# EAGLE board BNSK Authoring Light (EAGLE 9.6.2)

Size 78 x 68 mm. Coordinates in mm from the lower left corner, seen from the top.
Outline: 0,0 78,0 78,68 0,68 0,0
Copper layers (1*16): Top 0.035mm / dielectric 1.5mm / Bottom 0.035mm
Design rules "default": minimum track width 10mil, minimum drill 24mil, track to track 8mil, track to pad 8mil, pad to pad 8mil, via to via 8mil, smd to smd 8mil, copper to edge 40mil, drill to drill 8mil, minimum pad ring 10mil, minimum via ring 8mil, stop-mask expansion 4mil, vias tented up to drill 0mil, thermal gap 10mil

## Footprints (pad centres in the part's own frame; a part is rotated, then mirrored left to right if it is on the bottom)
DIL16 = drill 0.813 long: 1 -8.89,-3.81; 2 -6.35,-3.81; 3 -3.81,-3.81; 4 -1.27,-3.81; 5 1.27,-3.81; 6 3.81,-3.81; 7 6.35,-3.81; 8 8.89,-3.81; 9 8.89,3.81; 10 6.35,3.81; 11 3.81,3.81; 12 1.27,3.81; 13 -1.27,3.81; 14 -3.81,3.81; 15 -6.35,3.81; 16 -8.89,3.81
SMADIODE = smd 2.54 x 2.54: A 2.349,0; C -2.349,0
1X04 = drill 1.016 long: 1 -3.81,0; 2 -1.27,0; 3 1.27,0; 4 3.81,0
1206 = smd 1.6 x 1.803: A -1.422,0; C 1.422,0
1X01 = drill 1.016 octagon: 1 0,0
SIP10 = drill 0.6 long: 1 -11.46,0; 2 -8.92,0; 3 -6.38,0; 4 -3.84,0; 5 -1.3,0; 6 1.24,0; 7 3.78,0; 8 6.32,0; 9 8.86,0; 10 11.4,0
EG1218 = drill 0.9 pad 1.676: O -2.54,0; P 0,0; S 2.54,0
7-SEGMENT-DISPLAY = drill 0.65 pad 1.88: 1 -5.08,-7.62; 2 -2.54,-7.62; 3 0,-7.62; 4 2.54,-7.62; 5 5.08,-7.62; 6 5.08,7.62; 7 2.54,7.62; 8 0,7.62; 9 -2.54,7.62; 10 -5.08,7.62

## Placement (x,y rotation side)
4017BE  CD4017  [DIL16]  13.5,7.5 180 top
DA  [SMADIODE]  24,57 0 top
DB  [SMADIODE]  34,55 0 top
DC  [SMADIODE]  44,53 0 top
DD0  [SMADIODE]  54,52 0 top
DD1  [SMADIODE]  67,28 0 top
DE0  [SMADIODE]  67,42 0 top
DE1  [SMADIODE]  67,22 0 top
DE2  [SMADIODE]  67,48 0 top
DF0  [SMADIODE]  67,35 0 top
DF1  [SMADIODE]  67,16 0 top
JP_CLOCK_IN  [1X04]  40.5,3 0 top
LED_START  [1206]  14,20 0 top
LNG_BLUE_N  [1X01]  33,24 0 top
LNG_BLUE_P  [1X01]  48,24 0 top
LNG_RED_N  [1X01]  33,36 0 top
LNG_RED_P  [1X01]  48,36 0 top
LNG_WHITE_N  [1X01]  33,30 0 top
LNG_WHITE_P  [1X01]  48,30 0 top
OUTPUTS  [1X04]  75,6.5 270 top
RA_330_OHM  [SIP10]  13,34 45 top
S1  [EG1218]  41,18 180 top
U$1  7-SEGMENT-DISPLAYPTH  [7-SEGMENT-DISPLAY]  9.5,56.5 0 top

## Library data of the parts
4017BE = SparkFun-DigitalIC; PROD_ID: IC-11929
DA DB DC DD0 DD1 DE0 DE1 DE2 DF0 DF1 LED_START S1 = adafruit
JP_CLOCK_IN LNG_BLUE_N LNG_BLUE_P LNG_RED_N LNG_RED_P LNG_WHITE_N LNG_WHITE_P OUTPUTS = pinhead
RA_330_OHM = resistor-sip
U$1 = SparkFun-Displays

## Nets
CLOCK_IN: 4017BE.14 S1.P
GND: 4017BE.8 4017BE.13 JP_CLOCK_IN.1 OUTPUTS.1 RA_330_OHM.1
LNG_BLUE_P_CON: DC.C DD1.C DE2.C LNG_BLUE_P.1
LNG_RED_P_CON: DA.C DE0.C DF0.C LNG_RED_P.1
LNG_WHITE_P_CON: DB.C DD0.C DE1.C DF1.C LNG_WHITE_P.1
N$1: LED_START.C RA_330_OHM.2
N$2: RA_330_OHM.10 U$1.8
N$3: LNG_RED_N.1 RA_330_OHM.8
N$4: LNG_WHITE_N.1 RA_330_OHM.7
N$5: LNG_BLUE_N.1 RA_330_OHM.6
RESET: 4017BE.5 4017BE.15
SEG_A: 4017BE.3 DA.A LED_START.A U$1.7
SEG_B: 4017BE.2 DB.A U$1.6
SEG_C: 4017BE.4 DC.A U$1.4
SEG_D: 4017BE.7 DD0.A DD1.A U$1.2
SEG_DP: U$1.5
SEG_E: 4017BE.10 DE0.A DE1.A DE2.A U$1.1
SEG_F: 4017BE.1 DF0.A DF1.A U$1.9
TMR555_OUTPUT: JP_CLOCK_IN.3 OUTPUTS.3 S1.O
TMR555_OUTPUT_REVERSE: JP_CLOCK_IN.4 OUTPUTS.4
VCC: 4017BE.16 JP_CLOCK_IN.2 OUTPUTS.2 S1.S

## Tracks (layer width: path | path; a pad name or v marks a point on that pad's centre or on a via)
CLOCK_IN  (1 unrouted)
GND  (4 unrouted)
LNG_BLUE_P_CON  (3 unrouted)
LNG_RED_P_CON  (3 unrouted)
LNG_WHITE_P_CON  (4 unrouted)
N$1  (1 unrouted)
N$2  (1 unrouted)
N$3  (1 unrouted)
N$4  (1 unrouted)
N$5  (1 unrouted)
RESET  (1 unrouted)
SEG_A  (3 unrouted)
SEG_B  (2 unrouted)
SEG_C  (2 unrouted)
SEG_D  (3 unrouted)
SEG_E  (4 unrouted)
SEG_F  (3 unrouted)
TMR555_OUTPUT  (2 unrouted)
TMR555_OUTPUT_REVERSE  (1 unrouted)
VCC  (3 unrouted)

## Text on the board
tNames: Authoring Lights | GND | + | GND | VCC | GND | VCC | OUT | OUT_R | OUT | OUT_R
bNames: https://bit.ly/36Fu0YN | www.FredericTorres.com | MadeInTheUSB.net | PCBv3 - 2019.12 - Fixed